# Altium PCB 球锁设置板.PCBDOC
Units mm, origin at the board's own origin, x right, y up, seen from the top; angles counter-clockwise.
Board outline 32 x 7.25 mm, 2 copper layers (Top, Bottom), stack 0.323 mm thick; 5 components, 4 nets, 13 pads, 4 vias.
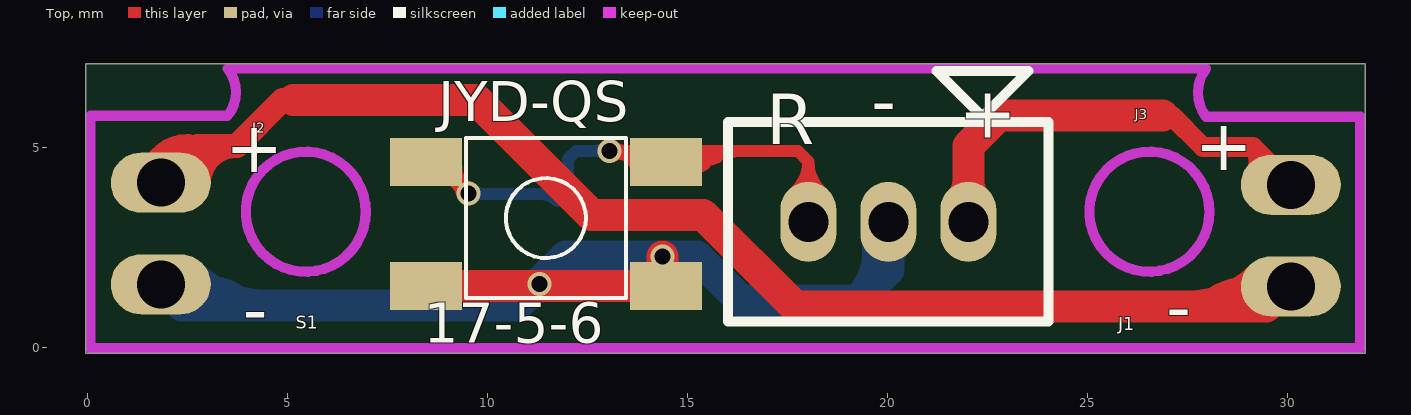
[diagram p0: Top view]
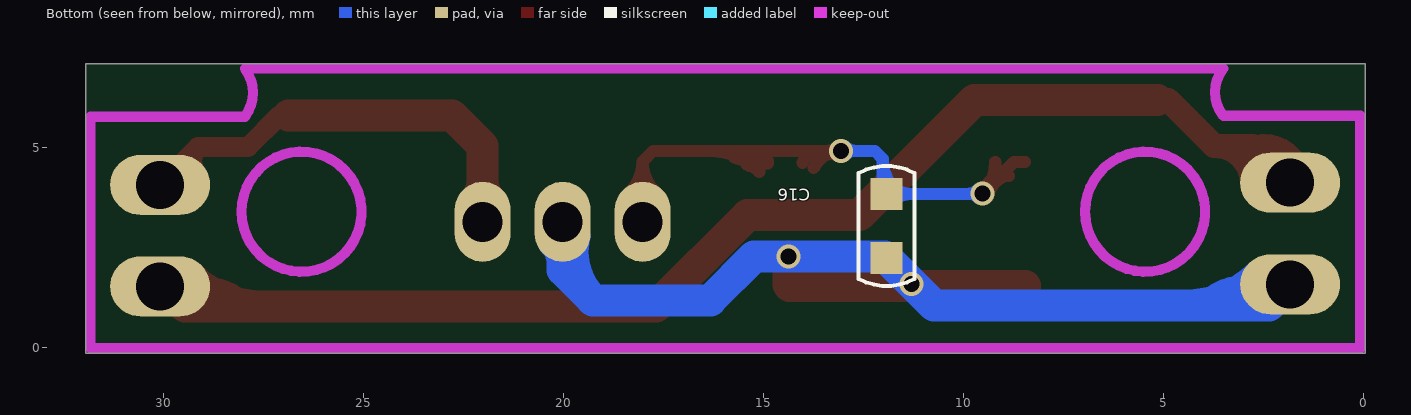
[diagram p1: Bottom view, seen from below]

## Layer stack, top to bottom
Top: signal copper 0.0343
Dielectric: core 0.254, FR-4, Dk 4.3
Bottom: signal copper 0.0343

## Board outline
-0.05,-0.134 31.947,-0.134 31.947,7.111 -0.05,7.111

## Design rules (kind name [scope] priority, off if disabled: settings)
Clearance [All] p1: gap=0.2
ComponentClearance [All] p1: gap=0 collisioncheckmode=3 verticalgap=0 showdistances=FALSE
FabricationTestPointUsage TestPointUsage [All] p1: valid=0 allowmultiple=FALSE
FabricationTestpoint Testpoint [All] p1: side=3 testpointundercomponent=TRUE minsize=1.016 maxsize=2.54 preferedsize=1.524 minholesize=0 maxholesize=1.016 preferedholesize=0.813 testpointgrid=0.025 allowsidetop=TRUE allowsidebottom=TRUE usegrid=TRUE gridtolerance=0
HoleSize [All] p1: absolutevalues=TRUE maxlimit=2.54 minlimit=0.254 maxpercent=80.000 minpercent=20.000
MinimumSolderMaskSliver [All] p1: minsoldermaskwidth=0
PlaneConnect "Power Plane Connect Style - from global settings" [All] p1: planeconnectstyle=Relief reliefexpansion=0.508 reliefentries=4 reliefconductorwidth=0.254 reliefairgap=0.254
PolygonConnect [All] p1: connectstyle=Relief reliefconductorwidth=0.305 reliefentries=4 polygonreliefangle="90 Angle" airgapwidth=0.254
RoutingVias [All] p1: holewidth=0.4 width=0.6 viastyle="Through Hole" minholewidth=0.4 minwidth=0.6 maxholewidth=0.4 maxwidth=0.6
SilkToSilkClearance [All] p1: silktosilkclearance=0
SilkToSolderMaskClearance SilkscreenOverComponentPads [IsPad] p1: minsilkscreentomaskgap=0 clearancetoexposedcopper=TRUE
SolderMaskExpansion [All] p1: expansion=0.102
Width [All] p1: maxlimit=1 minlimit=0.1 preferedwidth=0.254
20 further rules are at their usual default settings.

## Components (designator, comment, footprint, x,y, rotation, side; value= is the part's Value field where it differs from the comment)
C16 "C0603" C0603 11.92,3.05 r270 bottom
J1 "3PIN-2.0J" 3PIN-2.0J 20.019,3.154 r180 top
J2 "2P_2.54" 2P_2.54 1.831,4.131 r270 top
J3 "2P_2.54" 2P_2.54 30.081,1.539 r90 top
S1 "SW3" SW3 11.458,3.247 r180 top

## Footprints (in the part's own frame and the unit in brackets; to place one, negate y for a bottom-side part, rotate by r counter-clockwise, add the part's x,y. Pads: shape width x height; smd on the part's side, far side on the other; paste and mask are expansions set on the pad)
2P_2.54 [mm]
  oval 1.5x2.5 hole 1.2: 1(0,0) 2(2.54,0)
3PIN-2.0J [mm]
  oval 1.4x2 hole 1: 1(-2,0) 2(0,0) 3(2,0)
  silkscreen extent -4.01,-3.77 4.01,2.49
C0603 [mm]
  rect 0.8x0.8 smd: 1(-0.8,0) 2(0.8,0)
  silkscreen extent -1.5,-0.7 1.5,0.7
SW3 [mm]
  rect 1.8x1.2 smd: 1(-3,-1.403) 2(-3,1.697) 3(3,-1.403) 4(3,1.697)
  silkscreen extent -2,-2 2,2

## Via types
v1: diameter 0.6, hole 0.4, Top to Bottom, 4 vias

## Nets (pads, with @x,y where several pads share a name; then routed paths per layer and width w, separated by ;. In a path a pad name is that pad's centre, name@x,y a point inside that pad or via, vN(x,y) a via of type N, cw(c..) or ccw(c..) an arc to the next point about the centre after c; other vN are vias at no path point)
$$$7: J1.1 J3.2 | length 14.9
  Top w0.5: 26.872,5.817 27.093,5.817 27.885,5.025 29.135,5.025 ; J3.2@30.224,3.936 29.135,5.025 ; 29.135,5.025 cw(c28.785,4.675) 29.181,4.379 ccw(c28.785,4.675) 29.135,5.025
  Top w0.8: J1.1 22.019,5.052 22.784,5.817 26.872,5.817 ; 22.019,4.178 ccw(c22.743,4.178) 22.231,3.666 cw(c22.743,4.178) 22.019,4.178 ; 22.019,4.178 cw(c21.295,4.178) 21.807,3.666 ccw(c21.295,4.178) 22.019,4.178
$$$8: J2.1 J3.1 | length 47.2
  Top w0.6: J2.1@1.682,3.982 J2.1 2.755,5.055 ; 5.15,6.201 4.879,6.201 3.733,5.055 2.755,5.055 ; 2.755,5.055 ccw(c3.121,4.689) 2.699,4.391 cw(c3.121,4.689) 2.755,5.055 ; J2.1@1.581,4.146 cw(c2.509,4.127) 2.509,5.055 ccw(c2.509,4.127) J2.1@1.581,4.146 ; J2.1@2.181,4.134 cw(c3.121,4.115) 3.121,5.055 ccw(c3.121,4.115) J2.1@2.181,4.134 ; J2.1@2.781,4.122 cw(c3.733,4.103) 3.733,5.055 ccw(c3.733,4.103) J2.1@2.781,4.122
  Top w0.8: 5.15,6.201 9.724,6.201 12.597,3.327 15.392,3.327 17.684,1.036 29.459,1.036 30.021,1.599 J3.1@30.162,1.74 ; 28.354,1.221 cw(c28.893,0.287) J3.1@29.413,1.232 ; 27.522,1.036 ccw(c27.522,3.598) 29.334,1.786 cw(c27.522,3.598) 27.522,1.036
GND: C16.2 J1.2 J2.2 S1.2 S1.4 | length 38.7
  Top w0.8: S1.4 14.345,1.55 14.376,1.582 v1(14.376,2.286)
  Bottom w0.8: J2.2@1.711,1.711 J2.2 2.359,1.063 10.733,1.063 C16.2 11.956,2.286 v1(14.376,2.286) 15.232,2.286 16.326,1.192 19.265,1.192 ; J2.2@2.49,1.279 cw(c3.017,0.248) 3.596,1.251 ; J1.2 20.019,1.946 19.265,1.192 ; 19.265,1.192 ccw(c18.049,2.408) 19.726,2.788 cw(c18.049,2.408) 19.265,1.192 ; 20.019,2.13 ccw(c19.295,2.13) 19.807,2.642 cw(c19.295,2.13) 20.019,2.13 ; 20.019,2.13 cw(c20.743,2.13) 20.231,2.642 ccw(c20.743,2.13) 20.019,2.13 ; J2.2@2.578,1.838 ccw(c4.451,3.711) 4.451,1.063 cw(c4.451,3.711) J2.2@2.578,1.838
  other v1: 11.303,1.6
SWDIO/INIT_KEY: C16.1 J1.3 S1.1 S1.3 | length 34.7
  Top w0.305: S1.3 8.736,4.65 v1(9.525,3.861) cw(c10.296,4.632) S1.3@9.206,4.646 ; S1.3@8.858,4.302 cw(c8.858,3.758) S1.3@9.243,4.143 ; S1.3@9.052,4.253 cw(c8.698,3.639) v1@9.382,3.823 ; S1.3@9.191,4.173 cw(c9.005,3.85) v1@9.377,3.858 ; v1@9.377,3.861 ccw(c9.021,3.861) 9.273,4.113 ccw(c9.525,4.365) v1@9.525,4.008 ; v1@9.382,3.899 ccw(c9.038,3.991) 9.347,4.169 ccw(c9.655,4.348) v1@9.563,4.003 ; S1.1@14.891,4.678 ccw(c15.21,4.95) 15.42,4.587 ; S1.1@15.092,4.907 ccw(c15.234,5.061) 15.339,4.88 ccw(c15.472,4.649) S1.1@15.206,4.65 ; S1.1@15.122,4.876 ccw(c15.493,5.192) 15.737,4.77 ; J1.3 18.019,4.663 ; v1(13.056,4.928) cw(c13.056,4.159) 13.746,4.497 ccw(c13.056,4.159) v1(13.056,4.928) ; v1(13.056,4.928) 17.755,4.928 18.019,4.663 ; v1@13.129,4.8 cw(c13.308,4.491) 13.4,4.835 ; v1@13.129,4.8 cw(c13.308,4.491) 13.4,4.835 ; v1@13.129,4.8 cw(c13.308,4.491) 13.4,4.835 ; v1@13.183,5.001 ccw(c13.492,5.18) 13.4,4.835 ; v1@13.183,5.001 ccw(c13.492,5.18) 13.4,4.835 ; v1@13.183,5.001 ccw(c13.492,5.18) 13.4,4.835 ; 13.412,4.928 ccw(c13.412,4.571) 13.16,4.823 cw(c13.412,4.571) 13.412,4.928 ; 13.412,4.928 cw(c13.412,5.284) 13.16,5.032 ccw(c13.412,5.284) 13.412,4.928 ; 18.019,4.663 ccw(c19.08,4.663) 18.38,3.866 cw(c19.08,4.663) 18.019,4.663 ; 18.019,4.663 cw(c16.958,4.663) 17.658,3.866 ccw(c16.958,4.663) 18.019,4.663 ; 13.544,4.928 cw(c13.544,4.398) 14.02,4.631 ccw(c13.544,4.398) 13.544,4.928 ; S1.1@14.888,4.62 cw(c15.632,3.876) 15.632,4.928 ccw(c15.632,3.876) S1.1@14.888,4.62 ; S1.1@15.104,4.404 cw(c16.367,3.141) 16.367,4.928 ccw(c16.367,3.141) S1.1@15.104,4.404
  Bottom w0.305: v1(9.525,3.861) 9.536,3.85 C16.1 12.014,3.944 12.014,4.724 12.217,4.928 v1(13.056,4.928) ; v1@9.629,3.756 cw(c9.855,3.531) 9.855,3.85 ; v1@9.629,3.965 ccw(c9.907,4.243) 9.907,3.85 ; C16.1@11.745,3.675 ccw(c11.322,3.252) 11.322,3.85 ccw(c11.322,4.448) 11.745,4.025 ccw(c11.095,4.675) 12.014,4.675 ; C16.1@11.939,3.881 C16.1@11.942,3.879 ; 12.699,4.928 ccw(c12.699,5.284) 12.951,5.032 cw(c12.699,5.284) 12.699,4.928 ; 12.699,4.928 cw(c12.699,4.571) 12.951,4.823 ccw(c12.699,4.571) 12.699,4.928

## Keep-outs
Keep-Out Layer:
  circle w0.254: c26.547,3.406 r1.5
  circle w0.254: c5.457,3.406 r1.5
  lines w0.254: 27.961,5.781 cw(c28.761,6.382) 27.961,6.984 ; 27.961,5.781 31.82,5.781 31.82,-0.007 0.077,-0.007 0.077,5.804 3.5,5.804 ccw(c2.782,6.394) 3.5,6.984 27.961,6.984

## Silkscreen, mask and mechanical layers (free items; w line width, h text height)
Silkscreen Top:
  text "JYD-QS" at 8.763,5.664 h1
  text "-" at 19.59,5.555 h1.27
  text "+" at 21.779,5.258 h1.27
  text "R" at 16.97,5.096 h1.27
  text "+" at 27.686,4.445 h1.27
  text "+" at 3.442,4.389 h1.27
  text "-" at 26.971,0.4 h1.27
  text "-" at 3.879,0.338 h1.27
  text "17-5-6" at 8.407,0.127 h1
Drill Drawing:
  lines w0.025: 0,2.899 0.001,2.899 ; 15.73,6.984 15.731,6.984 ; 16.004,-0.007 16.004,-0.007 ; 31.82,2.887 31.821,2.887 ; 0.077,2.899 0.078,2.899